# Altium PCB antenna_array.PcbDoc
Units mm, origin at the board's own origin, x right, y up, seen from the top; angles counter-clockwise.
Board outline 259.5 x 68.68 mm, 2 copper layers (Top Layer, Bottom Layer); 4 components, 5 nets, 20 pads, 16 vias.
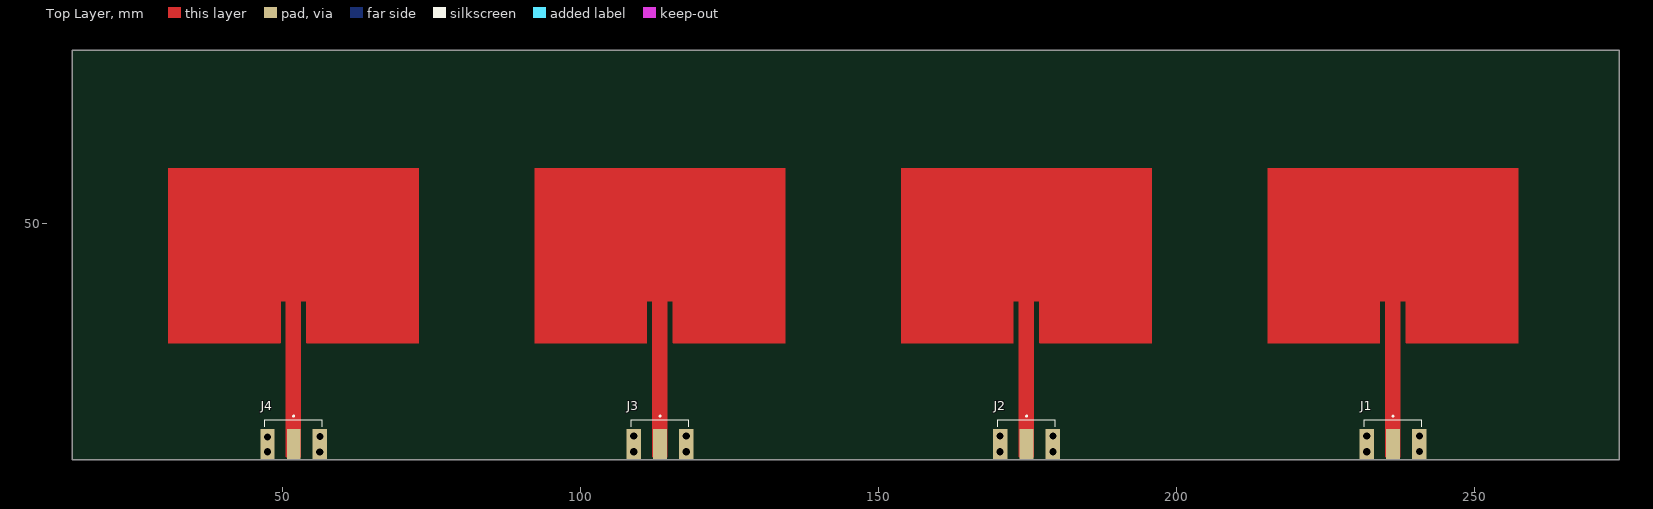
[diagram p0: Top Layer view]
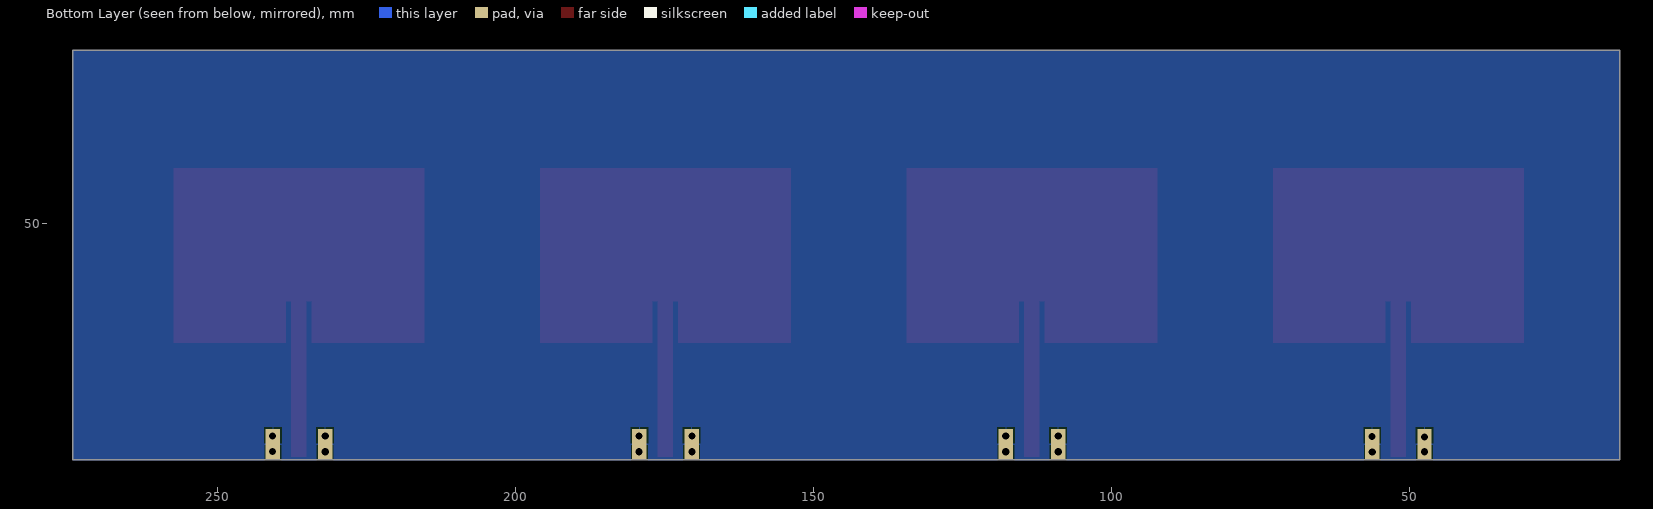
[diagram p1: Bottom Layer view, seen from below]
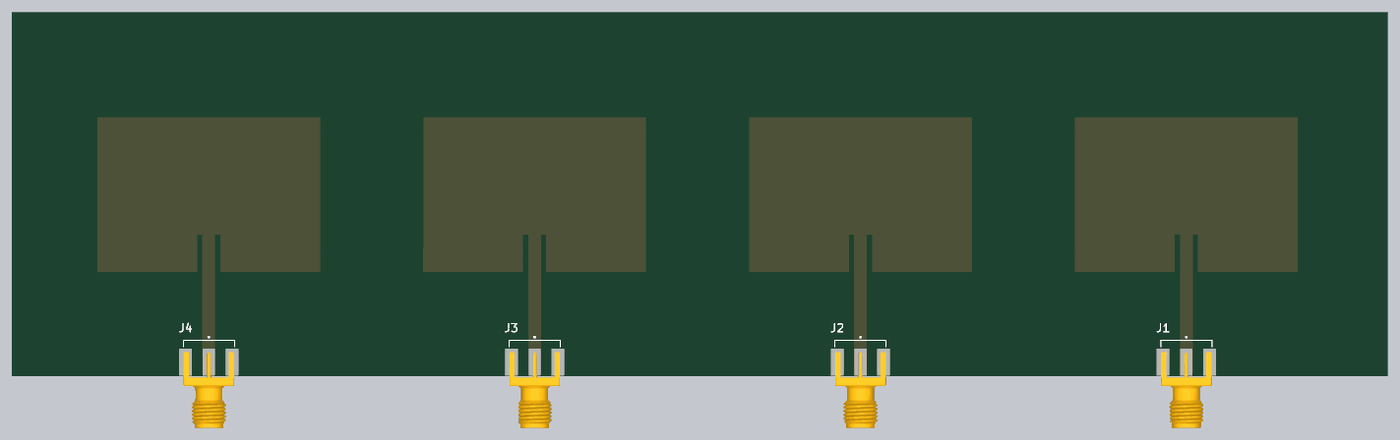
[diagram p2: 3D render of the assembled board from above, using the file's embedded part models]

## Layer stack, top to bottom
Top Solder: solder mask 0.0102, Solder Resist, Dk 3.5
Top Layer: signal copper 0.0356
Dielectric 1: dielectric 0.32, FR-4, Dk 4.8
Bottom Layer: signal copper 0.0356
Bottom Solder: solder mask 0.0102, Solder Resist, Dk 3.5

## Board outline
14.7,10.4 274.2,10.4 274.2,79.075 14.7,79.075

## Design rules (kind name [scope] priority, off if disabled: settings)
Clearance [All] p1: gap=0.254 ignorepadtopadclearanceinfootprint=FALSE
PolygonConnect [All] p1: connectstyle=Relief reliefconductorwidth=0.254 reliefentries=4 polygonreliefangle="90 Angle" airgapwidth=0.254
RoutingVias [All] p1: holewidth=0.711 width=1.27 viastyle="Through Hole" minholewidth=0.711 minwidth=1.27 maxholewidth=0.711 maxwidth=1.27
SolderMaskExpansion [All] p1: expansion=0.102 istentingtop=FALSE
SupplyNets "Schematic Supply Nets" [InNet('GND')] p1: voltage=0.000
Width [All] p1: maxlimit=0.254 minlimit=0.254 preferedwidth=0.254
30 further rules are at their usual default settings.

## Components (designator, comment, footprint, x,y, rotation, side; value= is the part's Value field where it differs from the comment)
J1 "142-0701-801" FP-142-0701-801-MFG 236.25,9.75 r270 top
J2 "142-0701-801" FP-142-0701-801-MFG 174.775,9.75 r270 top
J3 "142-0701-801" FP-142-0701-801-MFG 113.3,9.75 r270 top
J4 "142-0701-801" FP-142-0701-801-MFG 51.844,9.75 r270 top

## Footprints (in the part's own frame and the unit in brackets; to place one, negate y for a bottom-side part, rotate by r counter-clockwise, add the part's x,y. Pads: shape width x height; smd on the part's side, far side on the other; paste and mask are expansions set on the pad)
FP-142-0701-801-MFG [mil]
  rect 200x90 smd paste+0 mask+0: 1(-129,0)
  rect 200x95 smd far side paste+0 mask+0: 2(-129,172.5) 3(-129,-172.5)
  rect 200x95 smd paste+0 mask+0: 2(-129,172.5) 3(-129,-172.5)
  silkscreen extent -319,-190 -244,190, body extent -201,-188 361,188, height 176

## Part data
J1 J2 J3 J4: library part CMP-09588-000002-1, "CONN SMA JACK STR 50OHM EDGE MNT", Case/Package=SMA, Frequency=18GHz, Max Operating Temperature=165°C, Min Operating Temperature=-65°C, Operating Frequency="0 to 18 GHz", Package Quantity=5, Voltage Rating=335V, Body Material=Brass, Body Plating=Gold, Connector Type=SMA, Contact Material=Copper, Contact Plating=Gold, Depth=25.58mm, Fastening Type=Threaded, Gender=Female, Impedance=50R, Length=0.44inch, Max Frequency=18GHz, Mount=Edge, Orientation=Straight, Packaging=Bulk, Radiation Hardening=No, RoHS Compliant=Yes, Series=SMA, Termination=Solder

## Via types
v1: diameter 2, hole 1.2, Top Layer to Bottom Layer, 16 vias

## Nets (pads, with @x,y where several pads share a name; then routed paths per layer and width w, separated by ;. In a path a pad name is that pad's centre, name@x,y a point inside that pad or via, vN(x,y) a via of type N, cw(c..) or ccw(c..) an arc to the next point about the centre after c; other vN are vias at no path point)
Antenna1: J1.1 | length 113.1
  Top Layer w0.013: 215.241,30.044 234.041,30.044 234.041,37.044 235.041,37.044 235.041,30.044 ; 257.241,30.044 238.441,30.044 238.441,37.044 237.441,37.044 237.441,30.044 ; 235.041,30.044 237.441,30.044 ; 235.041,30.044 237.441,30.044 ; 235.041,30.044 235.041,10.894 237.441,10.894 237.441,30.044
Antenna2: J2.1 | length 110.7
  Top Layer w0.013: 153.771,30.044 172.571,30.044 172.571,37.044 173.571,37.044 173.571,30.044 ; 173.571,10.894 173.571,30.044 ; 175.971,10.894 175.971,30.044 ; 195.771,30.044 176.971,30.044 176.971,37.044 175.971,37.044 175.971,30.044 ; 173.571,30.044 175.971,30.044 ; 173.571,30.044 175.971,30.044
Antenna3: J3.1 | length 110.7
  Top Layer w0.013: 92.301,30.044 111.101,30.044 111.101,37.044 112.101,37.044 112.101,30.044 ; 112.101,10.894 112.101,30.044 ; 114.501,10.894 114.501,30.044 ; 134.301,30.044 115.501,30.044 115.501,37.044 114.501,37.044 114.501,30.044 ; 112.101,30.044 114.501,30.044 ; 112.101,30.044 114.501,30.044
Antenna4: J4.1 | length 110.7
  Top Layer w0.013: 30.831,30.044 49.631,30.044 49.631,37.044 50.631,37.044 50.631,30.044 ; 50.631,10.894 50.631,30.044 ; 53.031,10.894 53.031,30.044 ; 72.831,30.044 54.031,30.044 54.031,37.044 53.031,37.044 53.031,30.044 ; 50.631,30.044 53.031,30.044 ; 50.631,30.044 53.031,30.044
GND: J1.2 J1.3 J2.2 J2.3 J3.2 J3.3 J4.2 J4.3
  other v1: 56.225,11.725 47.45,11.75 108.9,11.75 117.7,11.75 170.35,11.75 179.2,11.75 231.85,11.75 240.7,11.775 47.45,14.25 56.25,14.325 108.9,14.375 117.7,14.375 170.35,14.375 179.2,14.375 231.85,14.375 240.7,14.4
copper on no net: | length 7.2
  Top Layer w0.013: 50.631,10.894 53.031,10.894 ; 112.101,10.894 114.501,10.894 ; 173.571,10.894 175.971,10.894

## Polygon pours and split planes (outlines as drawn)
GND on Bottom Layer "GND_L02_P000" (solid, pour order 0): 14.725,10.325 14.725,79.075 274.2,79.1 274.288,10.325

## Other copper
Top Layer:
  region net Antenna4: 30.831,59.3 72.838,59.3 72.838,30.044 72.831,30.037 54.031,30.037 54.025,30.044 54.025,37.037 53.038,37.037 53.038,10.894 53.031,10.887 50.631,10.887 50.625,10.894 50.625,37.037 49.638,37.037 49.638,30.044 49.631,30.037 30.831,30.037 30.825,30.044
  region net Antenna3: 92.301,59.3 134.308,59.3 134.308,30.044 134.301,30.037 115.501,30.037 115.495,30.044 115.495,37.037 114.508,37.037 114.508,10.894 114.501,10.887 112.101,10.887 112.095,10.894 112.095,37.037 111.108,37.037 111.108,30.044 111.101,30.037 92.301,30.037 92.295,30.044
  region net Antenna2: 153.771,59.3 195.778,59.3 195.778,30.044 195.771,30.037 176.971,30.037 176.965,30.044 176.965,37.037 175.978,37.037 175.978,10.894 175.971,10.887 173.571,10.887 173.565,10.894 173.565,37.037 172.578,37.037 172.578,30.044 172.571,30.037 153.771,30.037 153.765,30.044
  region net Antenna1: 215.241,59.3 257.248,59.3 257.248,30.044 257.241,30.037 238.441,30.037 238.435,30.044 238.435,37.037 237.448,37.037 237.448,10.894 237.441,10.887 235.041,10.887 235.035,10.894 235.035,37.037 234.048,37.037 234.048,30.044 234.041,30.037 215.241,30.037 215.235,30.044